# EAGLE board procesor-attiny85 smd (EAGLE 7.2.0)
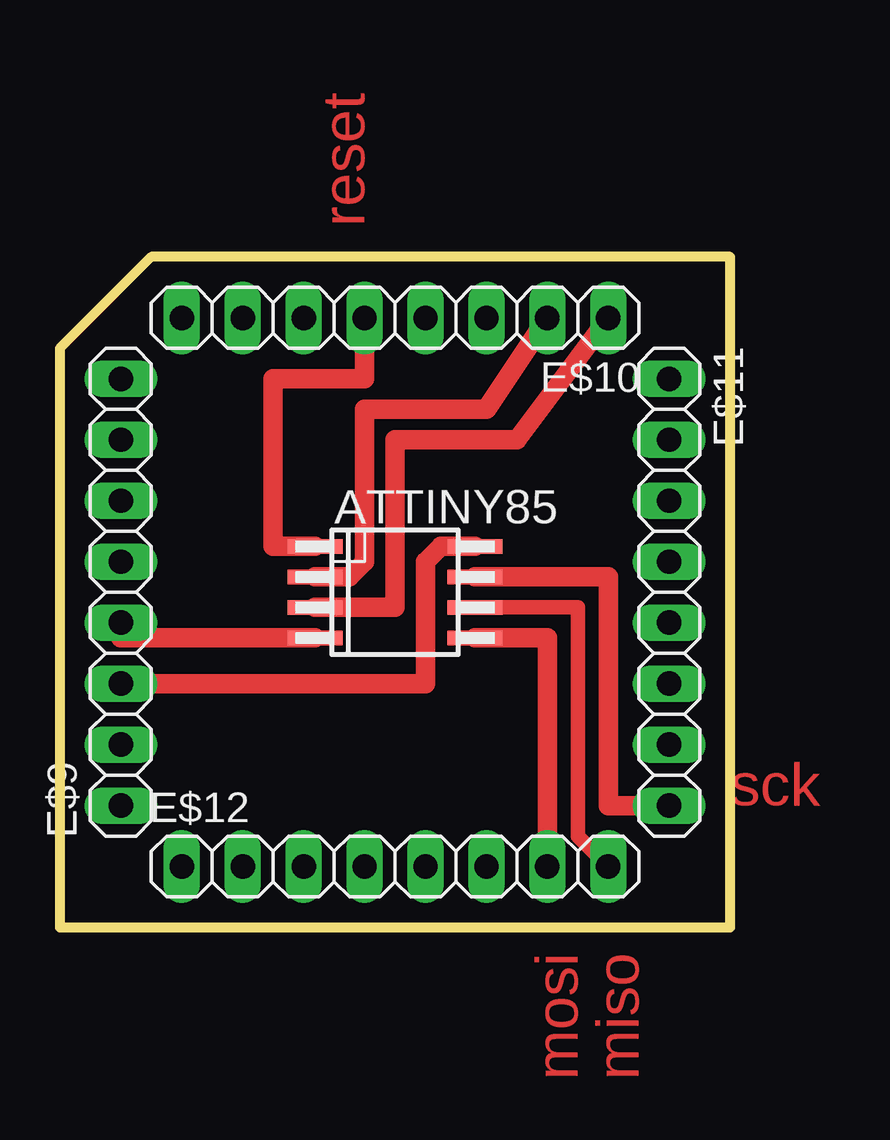
[diagram p0: board, top side]

Size 27.94 x 27.94 mm. Coordinates in mm from the lower left corner, seen from the top.
Outline: 3.81,27.94 0,24.13 0,0 27.94,0 27.94,27.94 3.81,27.94
Copper layers (1*16): Top 0.035mm / dielectric 1.5mm / Bottom 0.035mm
Design rules "default": minimum track width 10mil, minimum drill 24mil, track to track 8mil, track to pad 8mil, pad to pad 8mil, via to via 8mil, smd to smd 8mil, copper to edge 40mil, drill to drill 8mil, minimum pad ring 10mil, minimum via ring 8mil, stop-mask expansion 4mil, vias tented up to drill 0mil, thermal gap 10mil

## Footprints (pad centres in the part's own frame; a part is rotated, then mirrored left to right if it is on the bottom)
ATTINY85 = smd 0.6 x 2.286: 1 -1.905,-3.33; 2 -0.635,-3.33; 3 0.635,-3.33; 4 1.905,-3.33; 5 1.905,3.33; 6 0.635,3.33; 7 -0.635,3.33; 8 -1.905,3.33
1X08 = drill 1.016 long: 1 -8.89,0; 2 -6.35,0; 3 -3.81,0; 4 -1.27,0; 5 1.27,0; 6 3.81,0; 7 6.35,0; 8 8.89,0

## Placement (x,y rotation side)
ATTINY85  [ATTINY85]  13.97,13.97 270 top
E$9  [1X08]  2.54,13.97 90 top
E$10  [1X08]  13.97,25.4 180 top
E$11  [1X08]  25.4,13.97 270 top
E$12  [1X08]  13.97,2.54 0 top

## Library data of the parts
ATTINY85 = attiny
E$9-E$12 = pinhead

## Nets
S$2: ATTINY85.1 E$10.5
S$3: ATTINY85.4 E$9.4
S$4: ATTINY85.8 E$9.3
S$5: ATTINY85.7 E$11.8
S$6: ATTINY85.3 E$10.1
S$7: ATTINY85.2 E$10.2
S$8: ATTINY85.5 E$12.7
S$10: ATTINY85.6 E$12.8

## Tracks (layer width: path | path; a pad name or v marks a point on that pad's centre or on a via)
S$2
  Top 0.813: ATTINY85.1 8.89,15.88 8.89,22.86 12.7,22.86 E$10.5
S$3
  Top 0.813: ATTINY85.4 2.54,12.07 E$9.4
S$4
  Top 0.813: E$9.3 15.24,10.16 15.24,15.24 15.88,15.88 ATTINY85.8
S$5
  Top 0.813: ATTINY85.7 22.86,14.61 22.86,5.08 E$11.8
S$6
  Top 0.813: ATTINY85.3 13.97,13.34 13.97,20.32 19.05,20.32 E$10.1
S$7
  Top 0.813: E$10.2 17.78,21.59 12.7,21.59 12.7,15.24 12.07,14.61 ATTINY85.2
S$8
  Top 0.813: ATTINY85.5 20.32,12.07 E$12.7
S$10
  Top 0.61: E$12.8 21.59,3.81 21.59,13.34 ATTINY85.6

## Text on the board
Top: reset | sck | mosi | miso